# Altium PCB LED_Squencer.PcbDoc
Units mm, origin at the board's own origin, x right, y up, seen from the top; angles counter-clockwise.
Board outline 60 x 23 mm, 2 copper layers (Top Layer, Bottom Layer), stack 1.671 mm thick; 28 components, 26 nets, 77 pads, 22 vias.
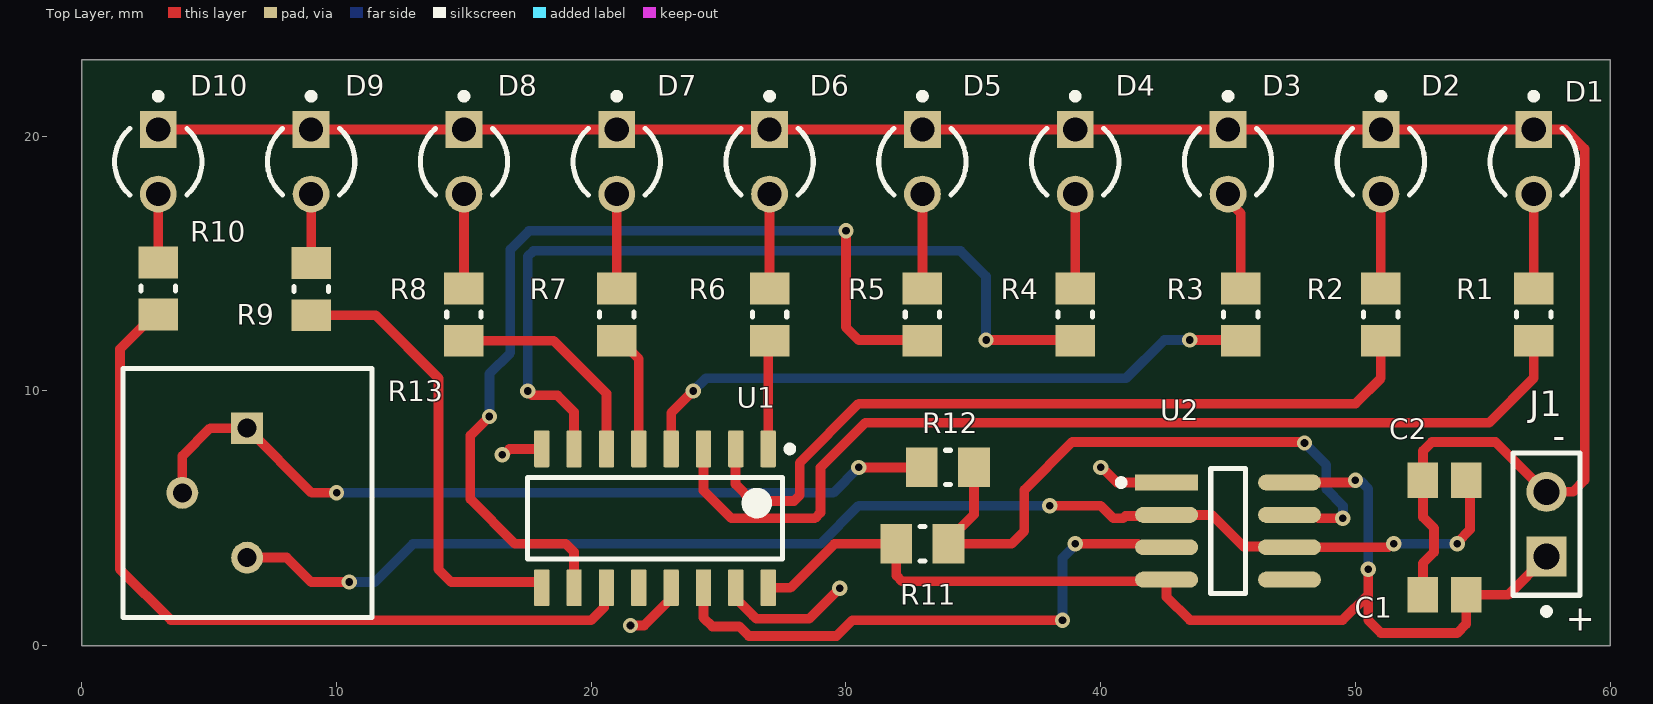
[diagram p0: Top Layer view]
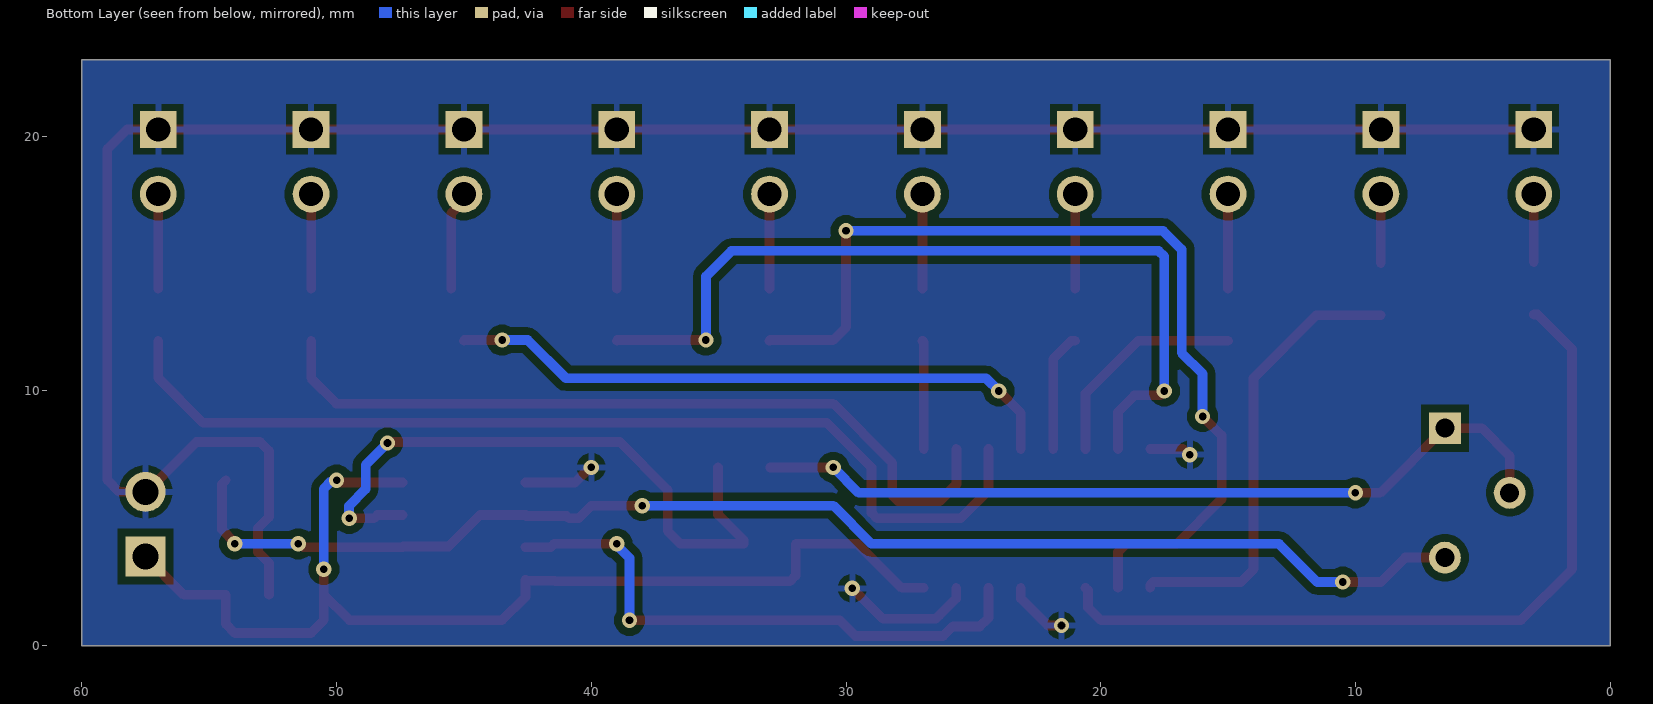
[diagram p1: Bottom Layer view, seen from below]
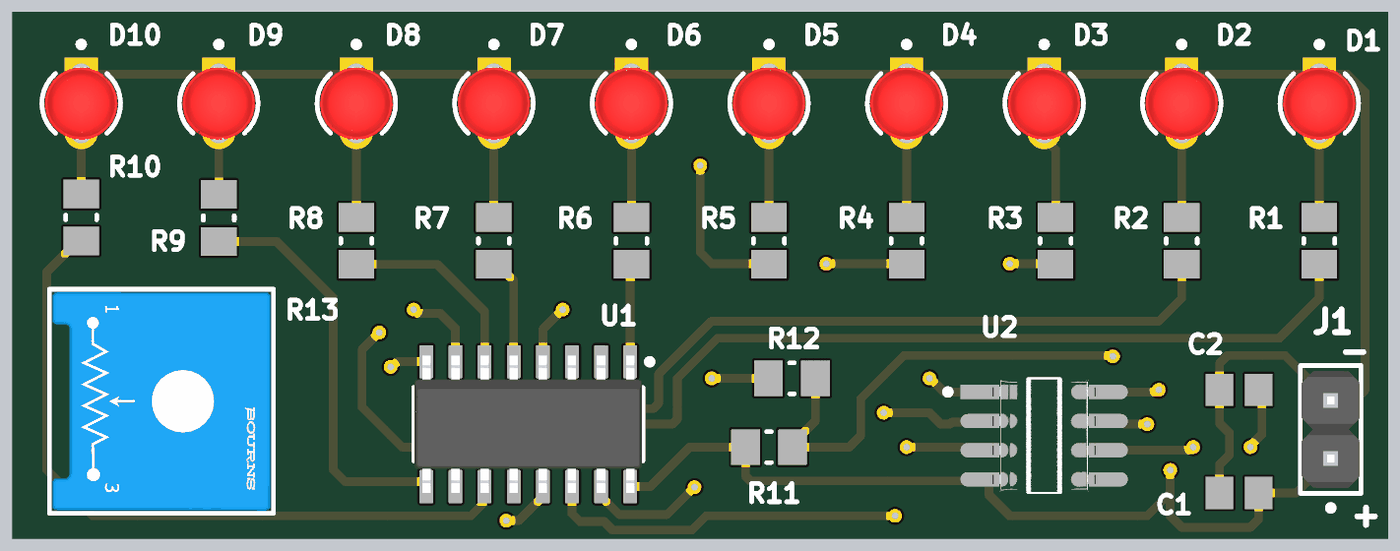
[diagram p2: 3D render of the assembled board from above, using the file's embedded part models]

## Layer stack, top to bottom
Top Solder: solder mask 0.0102, Solder Resist, Dk 3.5
Top Layer: signal copper 0.0356
Dielectric 1: dielectric 1.6, FR-4, Dk 4.8
Bottom Layer: signal copper 0.0356
Bottom Solder: solder mask 0.0102, Solder Resist, Dk 3.5

## Board outline
0,0 60,0 60,23 0,23

## Design rules (kind name [scope] priority, off if disabled: settings)
Clearance [All] p1: gap=0.3 ignorepadtopadclearanceinfootprint=FALSE
PolygonConnect [All] p1: connectstyle=Relief reliefconductorwidth=0.254 reliefentries=4 polygonreliefangle="90 Angle" airgapwidth=0.254
RoutingVias [All] p1: holewidth=0.3 width=0.6 viastyle="Through Hole" minholewidth=0.3 minwidth=0.6 maxholewidth=0.3 maxwidth=0.6
SilkToSolderMaskClearance [IsPad] p1: minsilkscreentomaskgap=0.1 clearancetoexposedcopper=TRUE
SolderMaskExpansion [All] p1: expansion=0.102 istentingtop=FALSE
UnRoutedNet [All] p1: checkbadconnections=TRUE
Width [All] p1: maxlimit=1 minlimit=0.3 preferedwidth=0.5
28 further rules are at their usual default settings.

## Components (designator, comment, footprint, x,y, rotation, side; value= is the part's Value field where it differs from the comment)
C1 "1u" CAPC2013X95X45NL10T25 53.5,2 r0 top
C2 "1u" CAPC2013X95X45NL10T25 53.5,6.5 r0 top
D1 "HLMP-1301" FP-HLMP-1301-MFG 57,19 r270 top
D2 "HLMP-1301" FP-HLMP-1301-MFG 51,19 r270 top
D3 "HLMP-1301" FP-HLMP-1301-MFG 45,19 r270 top
D4 "HLMP-1301" FP-HLMP-1301-MFG 39,19 r270 top
D5 "HLMP-1301" FP-HLMP-1301-MFG 33,19 r270 top
D6 "HLMP-1301" FP-HLMP-1301-MFG 27,19 r270 top
D7 "HLMP-1301" FP-HLMP-1301-MFG 21,19 r270 top
D8 "HLMP-1301" FP-HLMP-1301-MFG 15,19 r270 top
D9 "HLMP-1301" FP-HLMP-1301-MFG 9,19 r270 top
D10 "HLMP-1301" FP-HLMP-1301-MFG 3,19 r270 top
J1 "M20-9990246" FP-M20-9990246-MFG 57.5,4.77 r90 top
R1 "1k" RESC2013X60X30ML20T20 57,13 r90 top
R2 "1k" RESC2013X60X30ML20T20 51,13 r90 top
R3 "1k" RESC2013X60X30ML20T20 45.5,13 r90 top
R4 "1k" RESC2013X60X30ML20T20 39,13 r90 top
R5 "1k" RESC2013X60X30ML20T20 33,13 r90 top
R6 "1k" RESC2013X60X30ML20T20 27,13 r90 top
R7 "1k" RESC2013X60X30ML20T20 21,13 r90 top
R8 "1k" RESC2013X60X30ML20T20 15,13 r90 top
R9 "1k" RESC2013X60X30ML20T20 9,14 r90 top
R10 "1k" RESC2013X60X30ML20T20 3,14.025 r90 top
R11 "1k" RESC2013X60X30ML20T20 33,4 r180 top
R12 "1k" RESC2013X60X30ML20T20 34,7 r0 top
R13 "100k_Pot" FP-3386P-MFG 6.5,6 r270 top
U1 "CD4017BM" D0016A_N 22.5,5 r270 top
U2 "NE555DR" FP-D0008A-IPC_A 45,4.5 r0 top

## Footprints (in the part's own frame and the unit in brackets; to place one, negate y for a bottom-side part, rotate by r counter-clockwise, add the part's x,y. Pads: shape width x height; smd on the part's side, far side on the other; paste and mask are expansions set on the pad)
CAPC2013X95X45NL10T25 [mm] "Chip Capacitor, 2-Leads, Body 2.00x1.25mm, IPC Medium Density"
  rect 1.2x1.4 smd: 1(-0.85,0) 2(0.85,0)
  body extent -1.05,-0.67 1.05,0.67, height 0.95
D0016A_N [mm] "SOIC, 16-Leads, Body 10x4mm, Pitch 1.27mm, IPC Medium Density"
  rrect17% 1.45x0.6 smd: 1(-2.725,4.445) 2(-2.725,3.175) 3(-2.725,1.905) 4(-2.725,0.635) 5(-2.725,-0.635) 6(-2.725,-1.905) 7(-2.725,-3.175) 8(-2.725,-4.445) 9(2.725,-4.445) 10(2.725,-3.175) 11(2.725,-1.905) 12(2.725,-0.635) 13(2.725,0.635) 14(2.725,1.905) 15(2.725,3.175) 16(2.725,4.445)
  silkscreen extent -2.85,-5 1.6,5.42, body extent -3,-4.95 3,4.95, height 1.59
FP-3386P-MFG [mm]
  rect 1.25x1.25 hole 0.75 paste-1000 mask+0: 1(-2.54,-0.015)
  round 1.25 hole 0.75 paste-1000 mask+0: 2(0,-2.555) 3(2.54,-0.015)
  silkscreen extent -4.89,-4.89 4.89,4.89, body extent -4.99,-4.99 4.99,4.99, height 0.25
FP-D0008A-IPC_A [mm]
  rect 2.469x0.622 smd paste+0 mask+0: 1(-2.414,1.905)
  rrect100% 2.469x0.622 smd paste+0 mask+0: 2(-2.414,0.635) 3(-2.414,-0.635) 5(2.414,-1.905) 6(2.414,-0.635) 7(2.414,0.635) 8(2.414,1.905) ""(-2.414,-1.905)
  silkscreen extent -4.32,-2.45 0.68,2.45, body extent -4.15,-2.95 4.15,2.95, height 0.25
FP-HLMP-1301-MFG [mm]
  rect 1.45x1.45 hole 0.95 paste-1000 mask+0: 1(-1.27,0)
  round 1.45 hole 0.95 paste-1000 mask+0: 2(1.27,0)
  silkscreen extent -2.7,-1.71 1.3,1.71, body extent -2.22,-2.22 2.22,2.22, height 0.25
FP-M20-9990246-MFG [mm]
  rect 1.57x1.57 hole 1.02 paste-1000 mask+0: 1(-1.27,0)
  round 1.57 hole 1.02 paste-1000 mask+0: 2(1.27,0)
  silkscreen extent -3.55,-1.32 2.79,1.32, body extent -2.89,-1.42 2.89,1.42, height 0.25
RESC2013X60X30ML20T20 [mm] "Chip Resistor, 2-Leads, Body 2.00x1.25mm, IPC Low Density"
  rect 1.25x1.55 smd: 1(-1.025,0) 2(1.025,0)
  silkscreen extent -0.1,-0.67 0.1,0.67, body extent -1.1,-0.72 1.1,0.72, height 0.6

## Part data
C1 C2: library part CMP-2007-00166-1, Manufacturer=Murata, Part Number=GRM219F51E105ZA01D
D1 D2 D3 D4 D5 D6 D7 D8 D9 D10: library part CMP-18399-000007-1, "LED RED DIFFUSED T-1 T/H", Colour=Red, Forward Current=10mA, Forward Voltage=1.9V, Manufacturer=Broadcom, Max Junction Temp=+110°C, Package=0, Reverse Voltage=5V, Temperature="-40°C to +100°C", Temperature Range High=+100°C, Temperature Range Low=-40°C, Automotive=No, Category=Diode, ComponentLink2Description=Datasheet, ComponentLink2URL=https://docs.broadcom.com/docs/AV02-1555EN, Device Class L1=Optoelectronics, Device Class L2=LEDs, Device Class L3=unset, Digikey Description="LED RED DIFFUSED T-1 T/H", Lead Free=Yes, Led Orientation=Straight, Luminous Intensity=3.4mcd, Manufacturer Part Number=HLMP-1301, Mouser Description="Standard LEDs - Through Hole Red Diffused 635nm 3.4mcd", Octopart=https://octopart.com/hlmp-1301-broadcom-71130345, Peak Emmision Wavelength=635nm, RoHS=TRUE, Viewing Angle=60°, Wavelength=626nm
J1: library part CMP-15831-000009-1, "CONN HEADER VERT 2POS 2.54MM", Current Rating=3A, Manufacturer=Harwin, Temperature="-40°C to +105°C", Temperature Range High=+105°C, Temperature Range Low=-40°C, Automotive=No, Category=Conn, ComponentLink2Description=Datasheet, ComponentLink2URL=https://cdn.harwin.com/pdfs/M20-999.pdf, Conn Gender=Male, Conn Orientation=Vertical, Contact Material=Tin,Nickel, Device Class L1=Connectors, Device Class L2="Headers and Wire Housings", Device Class L3=unset, Digikey Description="CONN HEADER VERT 2POS 2.54MM", Height=8.99mm, Lead Free=Yes, Manufacturer Part Number=M20-9990246, Mouser Description="2.54mm (0.1\") Pitch SIL Vertical PC Tail Pin Header, 6.1mm mating pin height, tin, 2 contacts", Number Of Contacts=2, Number Of Rows=1, Octopart=https://octopart.com/m20-9990246-harwin-2590635, Package=M20-9990246, Pitch=2.54mm, RoHS=TRUE
R1 R2 R3 R4 R5 R6 R7 R8 R9 R10 R11 R12: library part CMP-2001-04656-1, Manufacturer="KOA Speer", Part Number=RK73B2ATTD102J
R13: library part CMP-2000-05592-8, "TRIMMER 100K OHM 0.5W PC PIN TOP", Color=Blue, Manufacturer Series=3386, Max Operating Temperature=125°C, Max Power Dissipation=500mW, Min Operating Temperature=-55°C, Package Quantity=100, Resistance=100kR, Resistance Law=Linear, Resistance Tolerance=10%, Resistor Type=Cermet, Temperature Coefficient=100ppm/°C, Voltage Rating=300V, Actuator Orientation=Vertical, Actuator Type=SCREW, Contact Plating=Tin, Depth=9.53mm, Height=4.83mm, Lead Free="Contains Lead", Length=9.53mm, Military Standard=Not, Mount="Through Hole", Number of Pins=3, Number of Terminals/Pins=3, Number of Turns=1, Packaging=Rail/Tube, Power Rating=500mW, Radiation Hardening=No, Reach SVHC Compliant=Yes, RoHS Compliant=Yes, Series="Trimpot® 3386 - Sealed", Taper=Linear, Technology=CERMET, Terminal Finish=Tin, Termination=Pin, Tolerance=10%, Type=Potentiometer, Weight=0.03oz, Width=9.53mm
U1: library part CMP-1623-00071-2, "CMOS Decade Counter with 10 Decoded Outputs, D0016A, TUBE", F @ Nom Voltage(Max)(Mhz)=8, Generic Part Number=CD4017B, ICC @ Nom Voltage(Max)(mA)=0.03, Manufacturer="Texas Instruments", Operating Temperature Range(C)="-55 to 125", Rating=Military, tpd @ Nom Voltage(Max)(ns)=270, Voltage(Nom)(V)=10, Bits(#)=10, Code_JEDEC="MS-012 variation AC", DatasheetVersion=SCHS027C, Function=Counter, Input Type=CMOS, Inputs=1, Output Drive (IOL/IOH)(Max)(mA)=1.5/-1.5, Output Type=CMOS, PackageReference=D0016A, Schmitt Trigger=No, Technology Family=CD4000, Type=Decade, VCC(Max)(V)=18, VCC(Min)(V)=3
U2: library part CMP-1685-00007-2, "IC OSC SGL TIMER 100KHZ 8-SOIC", Case/Package=SOIC, Frequency=100kHz, High Level Output Current=-200mA, Low Level Output Current=200mA, Max Operating Temperature=70°C, Max Supply Voltage=16V, Min Operating Temperature=0°C, Min Supply Voltage=4.5V, Operating Supply Current=10mA, Package Quantity=2500, Quiescent Current=15mA, Contact Plating=Gold, Height=1.58mm, Lead Free="Lead Free", Length=4.9mm, Mount="Surface Mount", Number of Pins=8, Number of Timers/Counters=1, Packaging="Tape and Reel", Radiation Hardening=No, REACH SVHC="No SVHC", Weight=0.002561oz, Width=3.91mm

## Via types
v1: diameter 0.6, hole 0.3, Top Layer to Bottom Layer, 22 vias

## Nets (pads, with @x,y where several pads share a name; then routed paths per layer and width w, separated by ;. In a path a pad name is that pad's centre, name@x,y a point inside that pad or via, vN(x,y) a via of type N, cw(c..) or ccw(c..) an arc to the next point about the centre after c; other vN are vias at no path point)
12V: C1.2 J1.1 R11.2 U1.16 U2. U2.8 | length 44.7
  Top Layer w0.381: U1.16 27.817,2.275 29.541,4 R11.2 31.975,2.748 32.198,2.525 41.422,2.525 41.446,2.549 42.54,2.549 U2. 42.586,1.914 43.5,1 49.5,1 50.5,2 ; U2.8 49.846,6.405 49.941,6.5 v1(50,6.5) ; v1(50.5,3) 50.5,2 ; J1.1 56,2 C1.2 54.35,0.85 54,0.5 51,0.5 50.5,1 50.5,2
  Bottom Layer w0.381: v1(50,6.5) 50.042,6.458 50.209,6.458 50.5,6.167 v1(50.5,3)
GND: C1.1 C2.1 D1.1 D2.1 D3.1 D4.1 D5.1 D6.1 D7.1 D8.1 D9.1 D10.1 J1.2 U1.8 U1.13 U1.15 U2.1 | length 95.1
  Top Layer w0.381: D10.1 D9.1 D8.1 D7.1 D6.1 D5.1 D4.1 D3.1 D2.1 D1.1 58.23,20.27 59,19.5 59,6.5 58.54,6.04 J1.2 57.46,6.04 55.5,8 53,8 52.65,7.65 C2.1 52.65,5.047 53.081,4.616 53.081,3.673 52.65,3.242 C1.1 ; v1(16.5,7.5) 16.559,7.5 16.784,7.725 U1.8 ; v1(21.542,0.792) 22.077,0.792 23.135,1.85 U1.13 ; U1.15 25.675,1.85 26.344,1.181 26.35,1.181 26.472,1.06 28.56,1.06 v1(29.75,2.25) ; v1(40,7) 40.042,7 40.637,6.405 U2.1
NetC2_2: C2.2 R13.3 U2.2 U2.6 | length 52.8
  Top Layer w0.381: R13.3 8.04,3.46 9,2.5 v1(10.5,2.5) ; v1(38,5.5) 40,5.5 40.5,5 40.881,5 40.97,5.089 42.54,5.089 U2.2 44.365,5.135 45.608,3.892 47.386,3.892 U2.6 51.306,3.865 51.441,4 v1(51.5,4) ; v1(54,4) 54,4.059 54.5,4.559 54.5,6.35 C2.2
  Bottom Layer w0.381: v1(10.5,2.5) 11.5,2.5 13,4 29,4 30.5,5.5 v1(38,5.5) ; v1(51.5,4) v1(54,4)
NetD1_2: D1.2 R1.2 | length 3.7
  Top Layer w0.381: R1.2 D1.2
NetD2_2: D2.2 R2.2 | length 3.7
  Top Layer w0.381: R2.2 D2.2
NetD3_2: D3.2 R3.2 | length 3.9
  Top Layer w0.381: D3.2 45,17.472 45.5,16.972 R3.2
NetD4_2: D4.2 R4.2 | length 3.7
  Top Layer w0.381: R4.2 D4.2
NetD5_2: D5.2 R5.2 | length 3.7
  Top Layer w0.381: R5.2 D5.2
NetD6_2: D6.2 R6.2 | length 3.7
  Top Layer w0.381: R6.2 D6.2
NetD7_2: D7.2 R7.2 | length 3.7
  Top Layer w0.381: R7.2 D7.2
NetD8_2: D8.2 R8.2 | length 3.7
  Top Layer w0.381: R8.2 D8.2
NetD9_2: D9.2 R9.2 | length 2.7
  Top Layer w0.381: R9.2 D9.2
NetD10_2: D10.2 R10.2 | length 2.7
  Top Layer w0.381: R10.2 D10.2
NetR1_1: R1.1 U1.3 | length 39.5
  Top Layer w0.381: U1.3 24.405,6.095 25.5,5 28.777,5 29,5.223 29,7 30.75,8.75 55.25,8.75 57,10.5 R1.1
NetR2_1: R2.1 U1.2 | length 31.2
  Top Layer w0.381: U1.2 25.658,7.708 25.658,6.342 26.319,5.681 27.958,5.681 28.181,5.904 28.181,7.181 30.5,9.5 50,9.5 51,10.5 R2.1
NetR3_1: R3.1 U1.4 | length 24.5
  Top Layer w0.381: U1.4 23.135,9.135 v1(24,10) ; v1(43.5,12) 44.975,12 R3.1@45,11.975
  Bottom Layer w0.381: v1(24,10) 24.5,10.5 41,10.5 42.5,12 v1(43.5,12)
NetR4_1: R4.1 U1.7 | length 33.4
  Top Layer w0.381: v1(17.5,10) 17.67,9.83 18.67,9.83 19.325,9.175 U1.7 ; v1(35.5,12) 38.975,12 R4.1
  Bottom Layer w0.381: v1(17.5,10) 17.5,15.277 17.723,15.5 34.5,15.5 35.5,14.5 v1(35.5,12)
NetR5_1: R5.1 U1.10 | length 37.3
  Top Layer w0.381: v1(16,9) 15.25,8.25 15.25,5.75 17,4 19,4 19.325,3.675 U1.10 ; v1(30,16.29) 30,12.5 30.5,12 32.975,12 R5.1
  Bottom Layer w0.381: v1(16,9) 16,10.681 16.819,11.5 16.819,15.559 17.551,16.29 v1(30,16.29)
NetR6_1: R6.1 U1.1 | length 4.3
  Top Layer w0.381: U1.1 26.945,11.92 R6.1
NetR7_1: R7.1 U1.5 | length 4.7
  Top Layer w0.381: R7.1 21.15,11.975 21.865,11.26 U1.5
NetR8_1: R8.1 U1.6 | length 8.6
  Top Layer w0.381: R8.1 18.525,11.975 20.595,9.905 U1.6
NetR9_1: R9.1 U1.9 | length 17.9
  Top Layer w0.381: R9.1 11.525,12.975 14,10.5 14,3 14.5,2.5 17.946,2.5 18.055,2.391 U1.9
NetR10_1: R10.1 U1.11 | length 31.6
  Top Layer w0.381: R10.1 2.85,13 1.5,11.65 1.5,3 3.5,1 20,1 20.5,1.5 20.5,2.18 U1.11
NetR11_1: R11.1 R12.2 U2.7 | length 25.7
  Top Layer w0.381: R12.2 35.025,5.15 34.025,4.15 R11.1 36.5,4 37,4.5 37,6.118 38.882,8 47.96,8 v1(48,7.96) ; U2.7 48.402,5.135 48.537,5 v1(49.5,5)
  Bottom Layer w0.381: v1(48,7.96) 48.857,7.102 48.857,6.143 49.515,5.485 49.515,5.015 v1(49.5,5)
NetR12_1: R12.1 R13.1 R13.2 | length 32.4
  Top Layer w0.381: R13.2 3.945,7.445 5.04,8.54 R13.1 9.025,6 v1(10,6) ; v1(30.5,7) R12.1
  Bottom Layer w0.381: v1(10,6) 29.5,6 v1(30.5,7)
NetU1_14: U1.14 U2.3 | length 22.7
  Top Layer w0.381: U1.14 24.405,1.095 24.75,0.75 25.812,0.75 26.183,0.379 29.629,0.379 30.25,1 v1(38.5,1) ; v1(39,4) 41.463,4 41.598,3.865 U2.3
  Bottom Layer w0.381: v1(38.5,1) 38.5,3.441 39,3.941 v1(39,4)
pads on no net: U1.12 U2.5

## Polygon pours and split planes (outlines as drawn)
GND on Bottom Layer "GND_L02_P000" (solid, pour order 0): 0,0 60,0 60,23 0,23

## Other copper
Top Layer:
  text "C" at 158.266,19.796 h4.58
  text "o" at 160.32,19.796 h4.58
  text "n" at 162.394,19.796 h4.58
  text "s" at 164.468,19.796 h4.58
  text "u" at 166.014,19.796 h4.58
  text "l" at 168.109,19.796 h4.58
  text "t" at 169.062,19.796 h4.58
  text "a" at 170.416,19.796 h4.58
  text "n" at 172.321,19.796 h4.58
  text "c" at 174.396,19.796 h4.58
  text "y" at 176.026,19.796 h4.58
  text "S" at 178.756,19.796 h4.58
  text "e" at 180.598,19.796 h4.58
  text "r" at 182.545,19.796 h4.58
  text "v" at 183.921,19.796 h4.58
  text "i" at 185.763,19.796 h4.58
  text "c" at 186.715,19.796 h4.58
  text "e" at 188.345,19.796 h4.58

## Silkscreen, mask and mechanical layers (free items; w line width, h text height)
Top Overlay:
  text "-" at 57.754,7.754 h1
  text "+" at 58.254,0.587 h1